# Altium PCB sgnd_rings.PcbDoc
Units mil, origin at the board's own origin, x right, y up, seen from the top; angles counter-clockwise.
Board outline 6000 x 4000 mil, 2 copper layers (Top Layer, Bottom Layer); 95 components, 79 nets, 371 pads, 0 vias.
Unrouted connection lines stored in the file: 239.
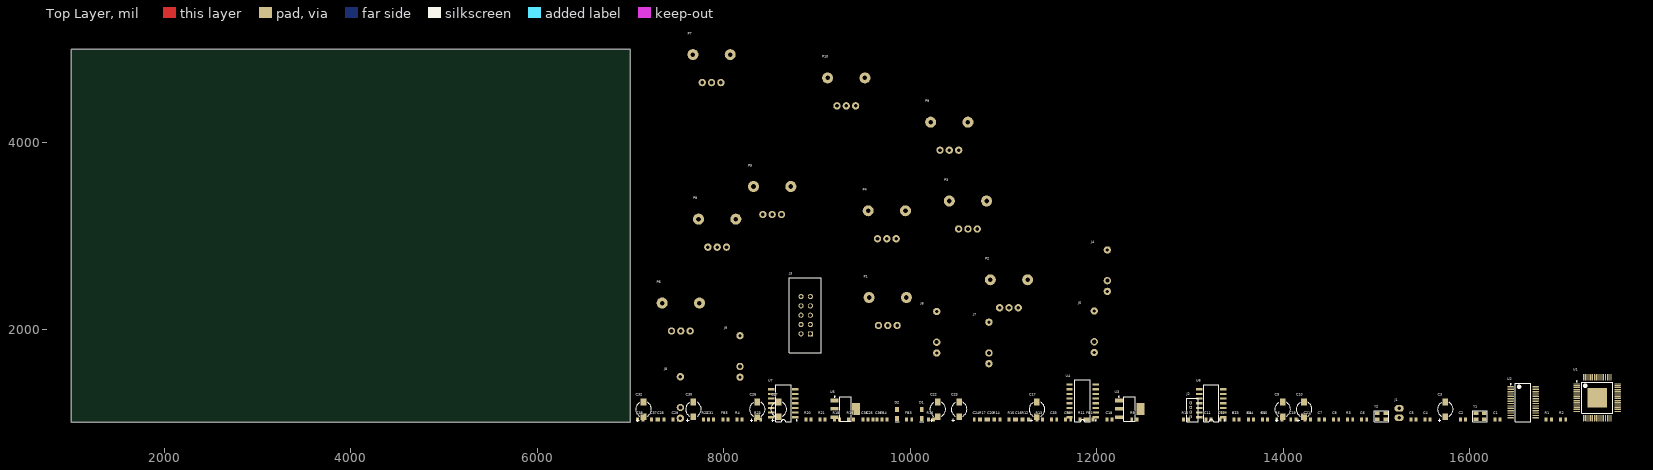
[diagram p0: Top Layer view]
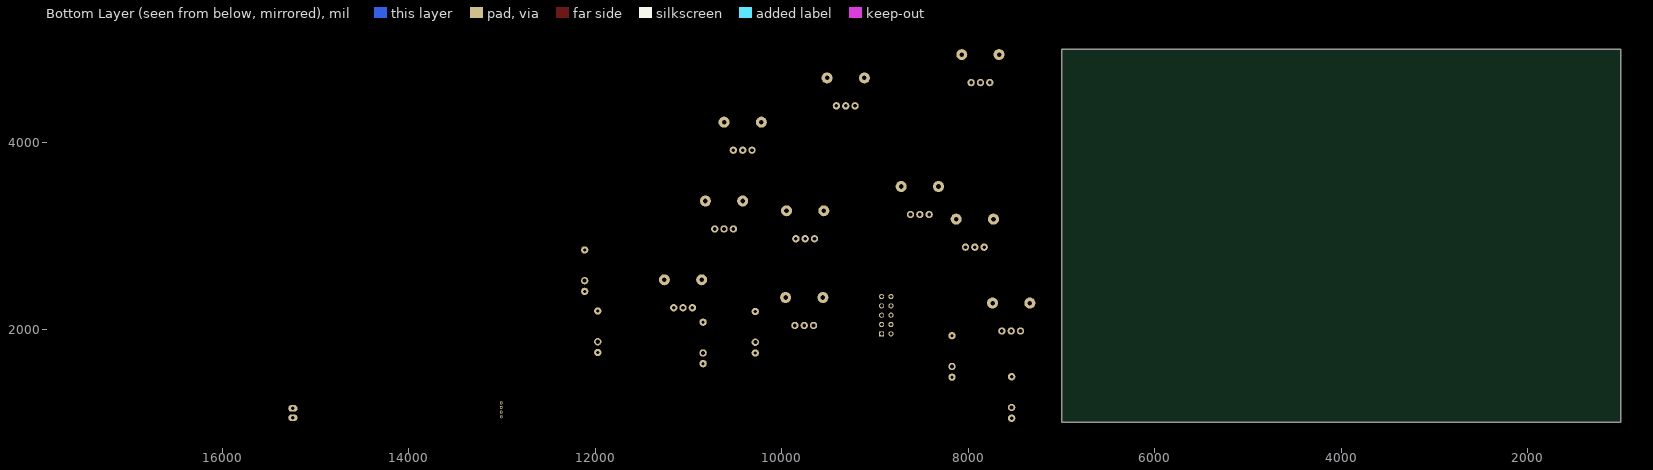
[diagram p1: Bottom Layer view, seen from below]

## Layer stack, top to bottom
Top Solder: solder mask 0.4, Solder Resist, Dk 3.5
Top Layer: signal copper 1.4
Dielectric 1: dielectric 12.6, FR-4, Dk 4.8
Bottom Layer: signal copper 1.4
Bottom Solder: solder mask 0.4, Solder Resist, Dk 3.5

## Board outline
1000,1000 7000,1000 7000,5000 1000,5000

## Design rules (kind name [scope] priority, off if disabled: settings)
Clearance [All] p1: gap=10 ignorepadtopadclearanceinfootprint=FALSE
PolygonConnect [All] p1: connectstyle=Relief reliefconductorwidth=10 reliefentries=4 polygonreliefangle="90 Angle" airgapwidth=10
RoutingVias [All] p1: holewidth=28 width=50 viastyle="Through Hole" minholewidth=28 minwidth=50 maxholewidth=28 maxwidth=50
SolderMaskExpansion [All] p1: expansion=4 istentingtop=FALSE
SupplyNets "Schematic Supply Nets_2" [InNet('AREF_-10')] p1: voltage=0.000
SupplyNets "Schematic Supply Nets_5" [InNet('+3.3VD')] p2: voltage=0.000
SupplyNets "Schematic Supply Nets_4" [InNet('-12V')] p3: voltage=0.000
SupplyNets "Schematic Supply Nets_3" [InNet('+12V')] p4: voltage=0.000
SupplyNets "Schematic Supply Nets_1" [InNet('GND')] p5: voltage=0.000
SupplyNets "Schematic Supply Nets" [InNet('+3.3VA')] p6: voltage=0.000
Width [All] p1: maxlimit=10 minlimit=10 preferedwidth=10
30 further rules are at their usual default settings.

## Classes and differential pairs
component class CV: C19 C21 C33 C34 C35 C36 C37 C38 J4 J5 J6 J7 J8 J9 R5 R6 R7 R8 R9 R10 R11 R12 R13 R14 R15 R16 R17 R18 R19 R20 R21 R22 R23 U6 U7
component class potmeters: C18 P1 P2 P3 P4 P5 P6 P7 P8 P9 P10 U4
component class sgnd_rings: C1 C2 C3 C4 C5 C6 C7 C8 C9 C10 C11 C12 C13 C14 C15 C16 C17 C20 C22 C23 C24 C25 C26 C27 C28 C29 C30 C31 C32 D1 D2 D3 FB1 FB3 FB4 FB5 J1 J2 J3 R1 R2 R3 R4 U1 U2 U3 U5 Y1 Y2

## Components (designator, comment, footprint, x,y, rotation, side; value= is the part's Value field where it differs from the comment)
C1 "Capacitor" C0603 16300,1030 r0 top value=18p
C2 "Capacitor" C0603 15930,1030 r0 top value=18p
C3 "C_ELCO" ELCO_SMD_4x5.3mm 15740,1140 r90 top value=10u
C4 "Capacitor" C0603 15550,1030 r0 top value=100n
C5 "Capacitor" C0603 15400,1030 r0 top value=18p
C6 "Capacitor" C0603 14870,1030 r0 top value=18p
C7 "Capacitor" C0603 14415,1030 r0 top value=2.2u
C8 "Capacitor" C0603 14570,1030 r0 top value=2.2u
C9 "C_ELCO" ELCO_SMD_4x5.3mm 13995,1140 r90 top value=10u
C10 "C_ELCO" ELCO_SMD_4x5.3mm 14225,1140 r90 top value=10u
C11 "Capacitor" C0603 13200,1030 r0 top value=100n
C12 "Capacitor" C0603 13350,1030 r0 top value=100n
C13 "Capacitor" C0603 13500,1030 r0 top value=100n
C14 "Capacitor" C0603 13655,1030 r0 top value=100n
C15 "Capacitor" C0603 13805,1030 r0 top value=100n
C16 "Capacitor" C0603 11170,1030 r0 top value=100n
C17 "C_ELCO" ELCO_SMD_4x5.3mm 11360,1140 r90 top value=10u
C18 "Capacitor" C0603 12140,1030 r0 top value=100n
C19 "Capacitor" C0603 14110,1030 r0 top value=1n
C20 "Capacitor" C0603 10870,1030 r0 top value=100n
C21 "Capacitor" C0603 14265,1030 r0 top value=2.2n
C22 "C_ELCO" ELCO_SMD_4x5.3mm 10295,1140 r90 top value=10u
C23 "C_ELCO" ELCO_SMD_4x5.3mm 10525,1140 r90 top value=10u
C24 "Capacitor" C0603 10715,1030 r0 top value=100n
C25 "Capacitor" C0603 9575,1030 r0 top value=100n
C26 "C_ELCO" ELCO_SMD_4x5.3mm 8360,1140 r90 top value=10u
C27 "C_ELCO" ELCO_SMD_4x5.3mm 8590,1140 r90 top value=10u
C28 "Capacitor" C0603 7330,1030 r0 top value=100n
C29 "Capacitor" C0603 7485,1030 r0 top value=100n
C30 "C_ELCO" ELCO_SMD_4x5.3mm 7675,1140 r90 top value=10u
C31 "Capacitor" C0603 7865,1030 r0 top value=100n
C32 "C_ELCO" ELCO_SMD_4x5.3mm 7140,1140 r90 top value=10u
C33 "Capacitor" C0603 11545,1030 r0 top value=1n
C34 "Capacitor" C0603 11695,1030 r0 top value=1n
C35 "Capacitor" C0603 9520,1030 r0 top value=2.2n
C36 "Capacitor" C0603 9670,1030 r0 top value=1n
C37 "Capacitor" C0603 7255,1030 r0 top value=100n
C38 "Capacitor" C0603 7105,1030 r0 top value=100n
D1 "1N4148" DIODE_SOD-123 10125,1090 r90 top value=1N5819
D2 "1N4148" DIODE_SOD-123 9860,1090 r90 top value=1N5819
FB1 "RESISTOR" R0603 11935,1030 r0 top value=600
FB3 "RESISTOR" R0603 9990,1030 r0 top value=600
FB4 "RESISTOR" R0603 9725,1030 r0 top value=600
FB5 "RESISTOR" R0603 8020,1030 r0 top value=600
J1 "BOOT" JUMPER_2.54 15245,1050 r90 top
J2 "DEBUG" "4PIN_CONNECTOR_VERTICAL_1,25MM_P - duplicate" 13030,1135 r90 top value=STM32_SWD_PROGRAMMER
J3 "IDC_socket_10pin" IDC10 8880,2150 r90 top value="IDC10 socket"
J4 "BRIGHTCV" PJ301_thonk 12115,2650 r0 top value=Audio_jack_mono
J5 "FMCV" PJ301_thonk 11975,1995 r0 top value=Audio_jack_mono
J6 "DAMPCV" PJ301_thonk 10285,1990 r0 top value=Audio_jack_mono
J7 "STRUCTCV" PJ301_thonk 10845,1875 r0 top value=Audio_jack_mono
J8 "VOCT" PJ301_thonk 7535,1290 r0 top value=Audio_jack_mono
J9 "POSCV" PJ301_thonk 8175,1730 r0 top value=Audio_jack_mono
P1 "BRIGHT" Potentiometer_vertical 9760,2340 r0 top value=10K
P2 "BRIGHT" Potentiometer_vertical 11060,2530 r0 top value=10K
P3 "BRIGHT" Potentiometer_vertical 10620,3375 r0 top value=10K
P4 "BRIGHT" Potentiometer_vertical 9750,3270 r0 top value=10K
P5 "BRIGHT" Potentiometer_vertical 8520,3530 r0 top value=10K
P6 "BRIGHT" Potentiometer_vertical 7540,2280 r0 top value=10K
P7 "BRIGHT" Potentiometer_vertical 7870,4945 r0 top value=10K
P8 "BRIGHT" Potentiometer_vertical 7930,3180 r0 top value=10K
P9 "BRIGHT" Potentiometer_vertical 10420,4220 r0 top value=10K
P10 "BRIGHT" Potentiometer_vertical 9315,4695 r0 top value=10K
R1 "RESISTOR" R0603 16850,1030 r0 top value=2.2K
R2 "RESISTOR" R0603 17005,1030 r0 top value=2.2K
R3 "RESISTOR" R0603 14720,1030 r0 top value=10K
R4 "RESISTOR" R0603 8170,1030 r0 top value=1K
R5 "RESISTOR" R0603 13805,1030 r0 top value=20K
R6 "RESISTOR" R0603 13960,1030 r0 top value=20K
R7 "RESISTOR" R0603 13500,1030 r0 top value=120K
R8 "RESISTOR" R0603 13655,1030 r0 top value=120K
R9 "RESISTOR" R0603 12405,1030 r0 top value=100K
R10 "RESISTOR" R0603 12960,1030 r0 top value=100K
R11 "RESISTOR" R0603 11850,1030 r0 top value=3.3M
R12 "RESISTOR" R0603 11240,1030 r0 top value=20K
R13 "RESISTOR" R0603 11390,1030 r0 top value=20K
R14 "RESISTOR" R0603 10935,1030 r0 top value=120K
R15 "RESISTOR" R0603 11090,1030 r0 top value=120K
R16 "RESISTOR" R0603 10225,1030 r0 top value=100K
R17 "RESISTOR" R0603 10785,1030 r0 top value=100K
R18 "RESISTOR" R0603 9215,1030 r0 top value=47K
R19 "RESISTOR" R0603 9365,1030 r0 top value=20K
R20 "RESISTOR" R0603 8910,1030 r0 top value=180K
R21 "RESISTOR" R0603 9060,1030 r0 top value=120K
R22 "RESISTOR" R0603 7810,1030 r0 top value=100K
R23 "RESISTOR" R0603 8370,1030 r0 top value=100K
U1 "STM32F405RGT6" STM-LQFP64_N 17370,1265 r0 top
U2 "WM8731" SSOP-28_L 16575,1215 r0 top
U3 "AMS1117_5V" SOT223 12355,1145 r0 top value="AMS1117 3.3V"
U4 "CD4051" SOP16 11850,1230 r90 top
U5 "AMS1117_5V" SOT223 9305,1145 r0 top value="AMS1117 3.3V"
U6 "MCP6004" SOP14_L 13230,1205 r90 top
U7 "MCP6004" SOP14_L 8640,1205 r90 top
Y1 "12.288MHz" XTAL_SMD_3.2x2.5x0.8 16115,1065 r0 top value=XTAL
Y2 "8MHz" XTAL_SMD_3.2x2.5x0.8 15055,1065 r0 top value=XTAL

## Footprints (in the part's own frame and the unit in brackets; to place one, negate y for a bottom-side part, rotate by r counter-clockwise, add the part's x,y. Pads: shape width x height; smd on the part's side, far side on the other; paste and mask are expansions set on the pad)
"4PIN_CONNECTOR_VERTICAL_1,25MM_P - duplicate" [mil]
  round 32 hole 21: 1(-75,20) 2(-25,20) 3(25,20) 4(75,20)
  silkscreen extent -128,-62 125,64, body extent -132,-66 130,68, height 170
C0603 [mm] "Chip Capacitor, 2-Leads, Body 1,85x0,90mm, IPC Medium Density"
  rect 0.8x1.05 smd: 1(-0.7,0) 2(0.7,0)
  body extent -0.8,-0.42 0.8,0.38, height 0.8
DIODE_SOD-123 [mil] "Chip Capacitor, 2-Leads, Body 1,85x0,90mm, IPC Medium Density"
  rect 53x41.34 smd: 1(-50,0) 2(50,0)
  silkscreen extent -84,-21 -84,21, body extent -73,-31 73,31, height 55
ELCO_SMD_4x5.3mm [mm]
  rect 1.8x1.524 smd: 1(-2,0) 2(2,0)
  silkscreen extent -3.34,-2.16 1.87,2.13, body extent -2.34,-2.15 2.26,2.15, height 5.2
IDC10 [mm] "IDC socket 10pin, 2.54mm"
  rect 1.4x1.4 hole 0.9: 1(-5.08,-1.27)
  round 1.4 hole 0.9: 2(-5.08,1.27) 3(-2.54,-1.27) 4(-2.54,1.27) 5(0,-1.27) 6(0,1.27) 7(2.54,-1.27) 8(2.54,1.27) 9(5.08,-1.27) 10(5.08,1.27)
  silkscreen extent -10.21,-4.3 10.17,4.53, body extent -10.16,-4.27 10.14,4.58, height 9.13
JUMPER_2.54 [mil]
  oval 70x100 hole 37.4: 1(0,0) 2(100,0)
  body extent -48,-50 148,50, height 374
PJ301_thonk [mm]
  round 2 hole 0.9: 1(0,-6.223) 3(0,5.08)
  round 2 hole 1.1: 2(0,-3.302)
  body extent -4.5,-6.58 4.5,6.05, height 14.5
Potentiometer_vertical [mm]
  round 2 hole 1: 1(-2.54,-7.62) 2(0,-7.62) 3(2.54,-7.62)
  round 3 hole 1.25: 4(-5.08,0) 5(5.08,0)
  body extent -6.05,-7.75 6.05,4.75, height 22.62
R0603 [mm] "Chip Capacitor, 2-Leads, Body 1,85x0,90mm, IPC Medium Density"
  rect 0.8x1.05 smd: 1(-0.7,0) 2(0.7,0)
  body extent -0.8,-0.4 0.8,0.4, height 0.4
SOP14_L [mil] "Small Outline; 14 Leads; Body Width 5.6 mm; Pitch 1.27 mm"
  rect 23.62x70 smd: 1(-150,-130) 2(-100,-130) 3(-50,-130) 4(0,-130) 5(50,-130) 6(100,-130) 7(150,-130) 8(150,130) 9(100,130) 10(50,130) 11(0,130) 12(-50,130) 13(-100,130) 14(-150,130)
  silkscreen extent -200,-147 200,83, body extent -200,-144 202,144, height 43
SOP16 [mm] "Small Outline; 16 Leads; Body Width 5.6 mm; Pitch 1.27 mm"
  rect 0.6x1.7 smd: 1(-4.445,-3.6) 2(-3.175,-3.6) 3(-1.905,-3.6) 4(-0.635,-3.6) 5(0.635,-3.6) 6(1.905,-3.6) 7(3.175,-3.6) 8(4.445,-3.6) 9(4.445,3.6) 10(3.175,3.6) 11(1.905,3.6) 12(0.635,3.6) 13(-0.635,3.6) 14(-1.905,3.6) 15(-3.175,3.6) 16(-4.445,3.6)
  silkscreen extent -5.73,-3.73 5.73,2.1, body extent -5.1,-3.96 5.1,3.96, height 2.02
SOT223 [mm] "3.3V_1A LOW DROPOUT VOLTAGE REGULATOR _SOT223"
  rect 2.15x1 smd: 1(-2.925,2.3) 2(-2.925,0) 3(-2.925,-2.3)
  rect 2.15x3.25 smd: 4(2.925,0)
  silkscreen extent -3.05,-3.35 1.55,3.47, body extent -3.48,-3.25 3.48,3.25, height 1.66
SSOP-28_L [mm] "SOP, 28-Leads, Body 10.2x5.3mm, Pitch 0.65mm, IPC High Density"
  oval 1.8x0.35 smd: 1(-3.4,4.225) 2(-3.4,3.575) 3(-3.4,2.925) 4(-3.4,2.275) 5(-3.4,1.625) 6(-3.4,0.975) 7(-3.4,0.325) 8(-3.4,-0.325) 9(-3.4,-0.975) 10(-3.4,-1.625) 11(-3.4,-2.275) 12(-3.4,-2.925) 13(-3.4,-3.575) 14(-3.4,-4.225) 15(3.4,-4.225) 16(3.4,-3.575) 17(3.4,-2.925) 18(3.4,-2.275) 19(3.4,-1.625) 20(3.4,-0.975) 21(3.4,-0.325) 22(3.4,0.325) 23(3.4,0.975) 24(3.4,1.625) 25(3.4,2.275) 26(3.4,2.925) 27(3.4,3.575) 28(3.4,4.225)
  silkscreen extent -3.52,-5.25 2.1,5.25, body extent -3.85,-5.16 3.9,5.17, height 2.15
STM-LQFP64_N [mm] "Thin QFP, 64-Leads, Body 10x10mm, Pitch 0.5mm, IPC Medium Density"
  oval 1.8x0.3 smd: 1(-5.55,3.75) 2(-5.55,3.25) 3(-5.55,2.75) 4(-5.55,2.25) 5(-5.55,1.75) 6(-5.55,1.25) 7(-5.55,0.75) 8(-5.55,0.25) 9(-5.55,-0.25) 10(-5.55,-0.75) 11(-5.55,-1.25) 12(-5.55,-1.75) 13(-5.55,-2.25) 14(-5.55,-2.75) 15(-5.55,-3.25) 16(-5.55,-3.75) 33(5.55,-3.75) 34(5.55,-3.25) 35(5.55,-2.75) 36(5.55,-2.25) 37(5.55,-1.75) 38(5.55,-1.25) 39(5.55,-0.75) 40(5.55,-0.25) 41(5.55,0.25) 42(5.55,0.75) 43(5.55,1.25) 44(5.55,1.75) 45(5.55,2.25) 46(5.55,2.75) 47(5.55,3.25) 48(5.55,3.75)
  rect 5.3x5.3 smd: 8(0,0)
  oval 0.3x1.8 smd: 17(-3.75,-5.55) 18(-3.25,-5.55) 19(-2.75,-5.55) 20(-2.25,-5.55) 21(-1.75,-5.55) 22(-1.25,-5.55) 23(-0.75,-5.55) 24(-0.25,-5.55) 25(0.25,-5.55) 26(0.75,-5.55) 27(1.25,-5.55) 28(1.75,-5.55) 29(2.25,-5.55) 30(2.75,-5.55) 31(3.25,-5.55) 32(3.75,-5.55) 49(3.75,5.55) 50(3.25,5.55) 51(2.75,5.55) 52(2.25,5.55) 53(1.75,5.55) 54(1.25,5.55) 55(0.75,5.55) 56(0.25,5.55) 57(-0.25,5.55) 58(-0.75,5.55) 59(-1.25,5.55) 60(-1.75,5.55) 61(-2.25,5.55) 62(-2.75,5.55) 63(-3.25,5.55) 64(-3.75,5.55)
  silkscreen extent -5.67,-4.25 4.25,4.57, body extent -6,-6 6,6, height 1.56
XTAL_SMD_3.2x2.5x0.8 [mil]
  rect 50x37 smd: 1(-45,-33) 2(45,-33) 3(45,33) 4(-45,33)
  silkscreen extent -78,-60 78,60, body extent -63,-49 63,49, height 32

## Part data
C1 C2 C4 C5 C6 C7 C8 C11 C12 C13 C14 C15 C16 C18 C19 C20 C21 C24 C25 C28 C29 C31 C33 C34 C35 C36 C37 C38: "Capacitor (Semiconductor SIM Model)", LatestRevisionDate=29-May-2009, LatestRevisionNote="IPC-7351 Footprint Added.", PackageDescription="Chip Capacitor", PackageReference=C1206, Published=8-Jun-2000, Publisher="Altium Limited"
D1 D2: library part 1N5819, "1 Amp General Purpose Rectifier", Code_JEDEC=DO-204-AL, DatasheetVersion=1998, LatestRevisionDate=17-Jul-2002, LatestRevisionNote="Re-released for DXP Platform.", PackageDescription="Diode, Axial; Body 5.2 x 2.7 mm (LxDia. max), Lead Dia. 0.86 mm (max)", PackageReference=DO-41, PackageVersion=Aug-1999, Published=8-Jun-2000, Publisher="Altium Limited"
FB1 FB3 FB4 FB5 R1 R2 R3 R4 R5 R6 R7 R8 R9 R10 R11 R12 R13 R14 R15 R16 R17 R18 R19 R20 R21 R22 R23: "Resistor", LatestRevisionDate=17-Jul-2002, LatestRevisionNote="Re-released for DXP Platform.", PackageDescription="Axial Device, Thru-Hole; 2 Leads; 0.3 in Pin Spacing", PackageReference=AXIAL-0.3, Published=8-Jun-2000, Publisher="Altium Limited"
J1: library part Jumper, "Jumper Wire", LatestRevisionDate=17-Jul-2002, LatestRevisionNote="Re-released for DXP Platform.", PackageDescription="Radial Cap, Thru-Hole; 2 Leads; 0.2 in Pin Spacing", PackageReference=RAD-0.2, Published=24-Mar-1999, Publisher="Altium Limited"
J2: library part STM32_SWD_PROGRAMMER
J4 J5 J6 J7 J8 J9: library part Audio_jack_mono
P1 P2 P3 P4 P5 P6 P7 P8 P9 P10: library part RPot, "Potentiometer", LatestRevisionDate=17-Jul-2002, LatestRevisionNote="Re-released for DXP Platform.", PackageDescription="Variable Resistor, Thru-Hole; 3 Leads", PackageReference=VR5, Published=8-Jun-2000, Publisher="Altium Limited", Set Position=0.5, Sim Note="Enter the Resistance value and the set point into parameter fields."
U1: "ARM Cortex-M4 32-bit MCU+FPU, 210 DMIPS, 1024 kB Flash, 192 kB Internal RAM, 51 I/Os, 64-pin LQFP, -40 to 85 degC, Tray", I/Os (High Current)=51, Manufacturer=STMicroelectronics, Operating Frequency(F) (Processor speed) (MHz)=168, Supplier Part Number 1=497-11767-ND, Supply Voltage(Vcc) max (V)=3.6, Supply Voltage(Vcc) min (V)=1.8, ComponentLink1Description="Manufacturer URL", ComponentLink1URL=http://www.st.com/web/en/home.html, ComponentLink2Description=Datasheet, ComponentLink2URL=http://www.st.com/st-web-ui/static/active/en/resource/technical/document/datasheet/DM00037051.pdf, ComponentLink3Description="Package Specification", ComponentLink3URL=http://www.st.com/st-web-ui/static/active/en/resource/technical/document/datasheet/DM00037051.pdf, Core="ARM Cortex-M4", D/A Converter=2x12-bit, DatasheetVersion="Rev. 4", FLASH Size (Prog) (kB)=1024, Internal RAM Size (kB)=192, Mounting Technology="Surface Mount", PackageDescription="64-Pin Low Profile Quad Flat Package, 10 x 10 mm Body, 0.5 mm Pitch", PackageReference=LQFP64, PackageVersion="Rev. 4, 06/2013", Packing=Tray, PartNumber=STM32F405RGT6, Supplier 1=Digi-Key, Supplier 2=Farnell, Supplier 3=Newark, Supplier 4=Mouser, Supplier Part Number 2=2064363, Supplier Part Number 3=73T2329, Supplier Part Number 4=511-STM32F405RGT6
U2: "Portable Internet Audio CODEC with Headphone Driver / and Programmable Sample Rates", Manufacturer=Microchip, PartNumber=MCP4822-E/P, Supplier Part Number 1=MCP4822-E/P-ND, Code_JEDEC=MS-001, DatasheetVersion="revA, Apr-2010", Mounting Technology="Through Hole", PackageDescription="8-Lead Plastic Dual In-Line (P) - 300 mil Body [PDIP]", PackageReference=PDIP300-P8, PackageVersion="revBB, Aug-2009", Supplier 1=Digi-Key, Supplier 2=Farnell, Supplier 3=Newark, Supplier 4=Mouser, Supplier Part Number 2=1439413, Supplier Part Number 3=11M1705, Supplier Part Number 4=579-MCP4822-E/P
U4: "CD4051 CMOS Single 8-Channel Analog Multiplexer/Demultiplexer  With Logic-Level Conversion"
U6 U7: "Rail-to-Rail Input/Output, 10 MHz Op Amps", LCSC Part=C7378, Manufacturer="Texas Instruments", PartNumber=TL074CN, Rating=Military, Supplier Part Number 1=296-1777-5-ND, Total Supply Voltage(Max)(+5V is 5, +/-5V is 10)=36, Total Supply Voltage(Min)(+5V is 5, +/-5V is 10)=7, CMRR(Min)(dB)=70, Code_JEDEC=MS-001, DatasheetVersion=SLOS080J, Eco-Plan="Pb-Free (RoHS)", GBW(Typ)(MHz)=3, IIB(Max)(pA)=200, Iq per channel(Max)(mA)=2.5, Mounting Technology="Through Hole", Number of Channels=4, Offset Drift(Typ)(uV/C)=18, PackageDescription="14-Pin Plastic In-Line, Body 19.305 x 6.35 mm, Pitch 2.54 mm", PackageReference=N14, PackageVersion="4040049/E, 12/2002", Slew Rate(Typ)(V/us)=13, Sub Family="General Purpose Amplifier, High Supply Voltage Amplifier (>=30V)", Supplier 1=Digi-Key, Supplier 2=Newark, Supplier 3=Mouser, Supplier Part Number 2=60K6990, Supplier Part Number 3=595-TL074CN, Vio (25C)(Max)(mV)=10, Vn at 1kHz(Typ)(nV/rtHz)=18
Y1 Y2: library part XTAL_3225-24.576M-SR, "Crystal Oscillator", LatestRevisionDate=17-Jul-2002, LatestRevisionNote="Re-released for DXP Platform.", PackageDescription="Crystal, Thru-Hole; 2 Leads; Body 3.1 x 8.2 mm (Dia.xH)", PackageReference=R38, Published=8-Jun-2000, Publisher="Altium Limited"

## Nets (pads, with @x,y where several pads share a name; then routed paths per layer and width w, separated by ;. In a path a pad name is that pad's centre, name@x,y a point inside that pad or via, vN(x,y) a via of type N, cw(c..) or ccw(c..) an arc to the next point about the centre after c; other vN are vias at no path point)
+3.3VA: C10.1 C15.2 C18.1 C37.2 C38.2 FB5.1 P1.1 P2.1 P3.1 P4.1 P5.1 P6.1 P7.1 P8.1 P9.1 P10.1 U2.8 U2.14 U4.16 U6.4 U7.4
+3.3VD: C9.1 C11.2 C12.2 C13.2 C14.2 FB1.1 J1.2 J2.4 R1.2 R2.2 U1.1 U1.13 U1.19 U1.32 U1.48 U1.64 U2.1 U2.27
+12V: C16.1 C28.1 FB4.2 U3.3 U5.3
-12V: FB3.2 R4.2
AREF_-10: C31.1 C32.2 R4.1 R7.1 R8.1 R11.1 R14.1 R15.1 R20.1 R21.1
AUX_OUT: U2.13
BOOT_FLASH: J1.1 R3.2 U1.60
BRIGHT: P1.2 U4.4
BRIGHTATTN: P3.2 U4.2
BRIGHTNESS_CV: C19.2 R5.2 U1.14 U6.1
DAMP: P6.2 U4.5
DAMP_CV: C33.2 R12.2 U1.21 U6.8
DAMPATTN: P4.2 U4.13
FM_CV: C21.2 R6.2 U1.20 U6.7
FREQATTN: P5.2 U4.1
FREQUENCY_POT: P9.2 U1.11
GEOMETRY_CV: C34.2 R13.2 U1.22 U6.14
GEOMETRY_POT: P10.2 U1.10
GEOMETYATTN: P7.2 U4.14
GND: C1.2 C2.2 C3.2 C4.1 C5.2 C6.2 C7.1 C8.1 C9.2 C10.2 C11.1 C12.1 C13.1 C14.1 C15.1 C16.2 C17.2 C18.2 C20.2 C22.1 C23.1 C24.1 C25.2 C26.2 C27.2 C28.2 C29.2 C30.2 C31.2 C32.1 C37.1 C38.1 J2.3 J3.3 J3.4 J3.5 J3.6 J3.7 J3.8 J4.1 J5.1 J6.1 J7.1 J8.1 J9.1 P1.3 P2.3 P3.3 P4.3 P5.3 P6.3 P7.3 P8.3 P9.3 P10.3 R3.1 U1.12 U1.18 U1.26 U1.28 U1.63 U2.11 U2.15 U2.21 U2.22 U2.28 U3.1 U4.6 U4.7 U4.8 U5.1 U6.3 U6.5 U6.10 U6.11 U6.12 U7.3 U7.5 U7.10 U7.11 U7.12
I2C_SCL: R2.1 U1.29 U2.24
I2C_SDA: R1.1 U1.30 U2.23
I2S_LRCK: U1.33 U2.5 U2.7
I2S_SCK: U1.34 U2.3
I2S_SIN: U1.35 U2.6
I2S_SOUT: U1.36 U2.4
IN_1: U2.20
IN_2: U2.19
LED1G: U1.52
LED1R: U1.53
LED2G: U1.51
LED2R: U1.8
MAIN_OUT: U2.12
MUX_ADDR_0: U1.59 U4.11
MUX_ADDR_1: U1.58 U4.10
MUX_ADDR_2: U1.57 U4.9
MUXED_POTS: U1.9 U4.3
N_PROBE: U1.39
NetC1_1: C1.1 U2.26 Y1.3
NetC2_1: C2.1 U2.25 Y1.1
NetC3_1: C3.1 C4.2 U2.16
NetC5_1: C5.1 U1.5 Y2.3
NetC6_1: C6.1 U1.6 Y2.1
NetC7_2: C7.2 U1.47
NetC8_2: C8.2 U1.31
NetC17_1: C17.1 C20.1 FB1.2 U3.2
NetC19_1: C19.1 R5.1 R7.2 R9.2 U6.2
NetC21_1: C21.1 R6.1 R8.2 R10.2 U6.6
NetC22_2: C22.2 C23.2 C24.2 D1.2 FB3.1
NetC25_1: C25.1 C26.1 C27.1 D2.1 FB4.1
NetC29_1: C29.1 C30.1 FB5.2 U5.2
NetC33_1: C33.1 R12.1 R14.2 R16.2 U6.9
NetC34_1: C34.1 R13.1 R15.2 R17.2 U6.13
NetC35_1: C35.1 R18.1 R20.2 R22.2 U7.2
NetC36_1: C36.1 R19.1 R21.2 R23.2 U7.6
NetD1_1: D1.1 J3.1 J3.2
NetD2_2: D2.2 J3.9 J3.10
NetJ4_3: J4.3 R9.1
NetJ5_2: J5.2 R11.2
NetJ5_3: J5.3 R10.1
NetJ6_3: J6.3 R16.1
NetJ7_3: J7.3 R17.1
NetJ8_2: J8.2
NetJ8_3: J8.3 R22.1
NetJ9_3: J9.3 R23.1
NetU7_8: U7.8 U7.9
NetU7_13: U7.13 U7.14
POS: P2.2 U4.12
POSATTN: P8.2 U4.15
POSITION_CV: C36.2 R19.2 U1.23 U7.7
RESET: U1.7
STRUM: U1.16
SW_MODE: U1.61
SW_POLYPHONY: U1.62
SWCLK: J2.1 U1.49
SWDIO: J2.2 U1.46
UART_RX??: U1.43
UART_TX: U1.42
V_OCT_CV: C35.2 R18.2 U1.15 U7.1
pads on no net: J4.2 J6.2 J7.2 J9.2 P1.4 P1.5 P2.4 P2.5 P3.4 P3.5 P4.4 P4.5 P5.4 P5.5 P6.4 P6.5 P7.4 P7.5 P8.4 P8.5 P9.4 P9.5 P10.4 P10.5 U1.2 U1.3 U1.4 U1.17 U1.24 U1.25 U1.27 U1.37 U1.38 U1.40 U1.41 U1.44 U1.45 U1.50 U1.54 U1.55 U1.56 U2.2 U2.9 U2.10 U2.17 U2.18 U3.4 U5.4 Y1.2 Y1.4 Y2.2 Y2.4